# Altium PCB CT310高端控制盒核心板电路V1.2.PcbDoc (part 1 of 4)
Units mil, origin at the board's own origin, x right, y up, seen from the top; angles counter-clockwise.
Board outline 3735.76 x 4625 mil, 2 copper layers (TOP, BOTTOM), stack 10.4 mil thick; 194 components, 362 nets, 1084 pads, 348 vias.
Unrouted connection lines stored in the file: 16.
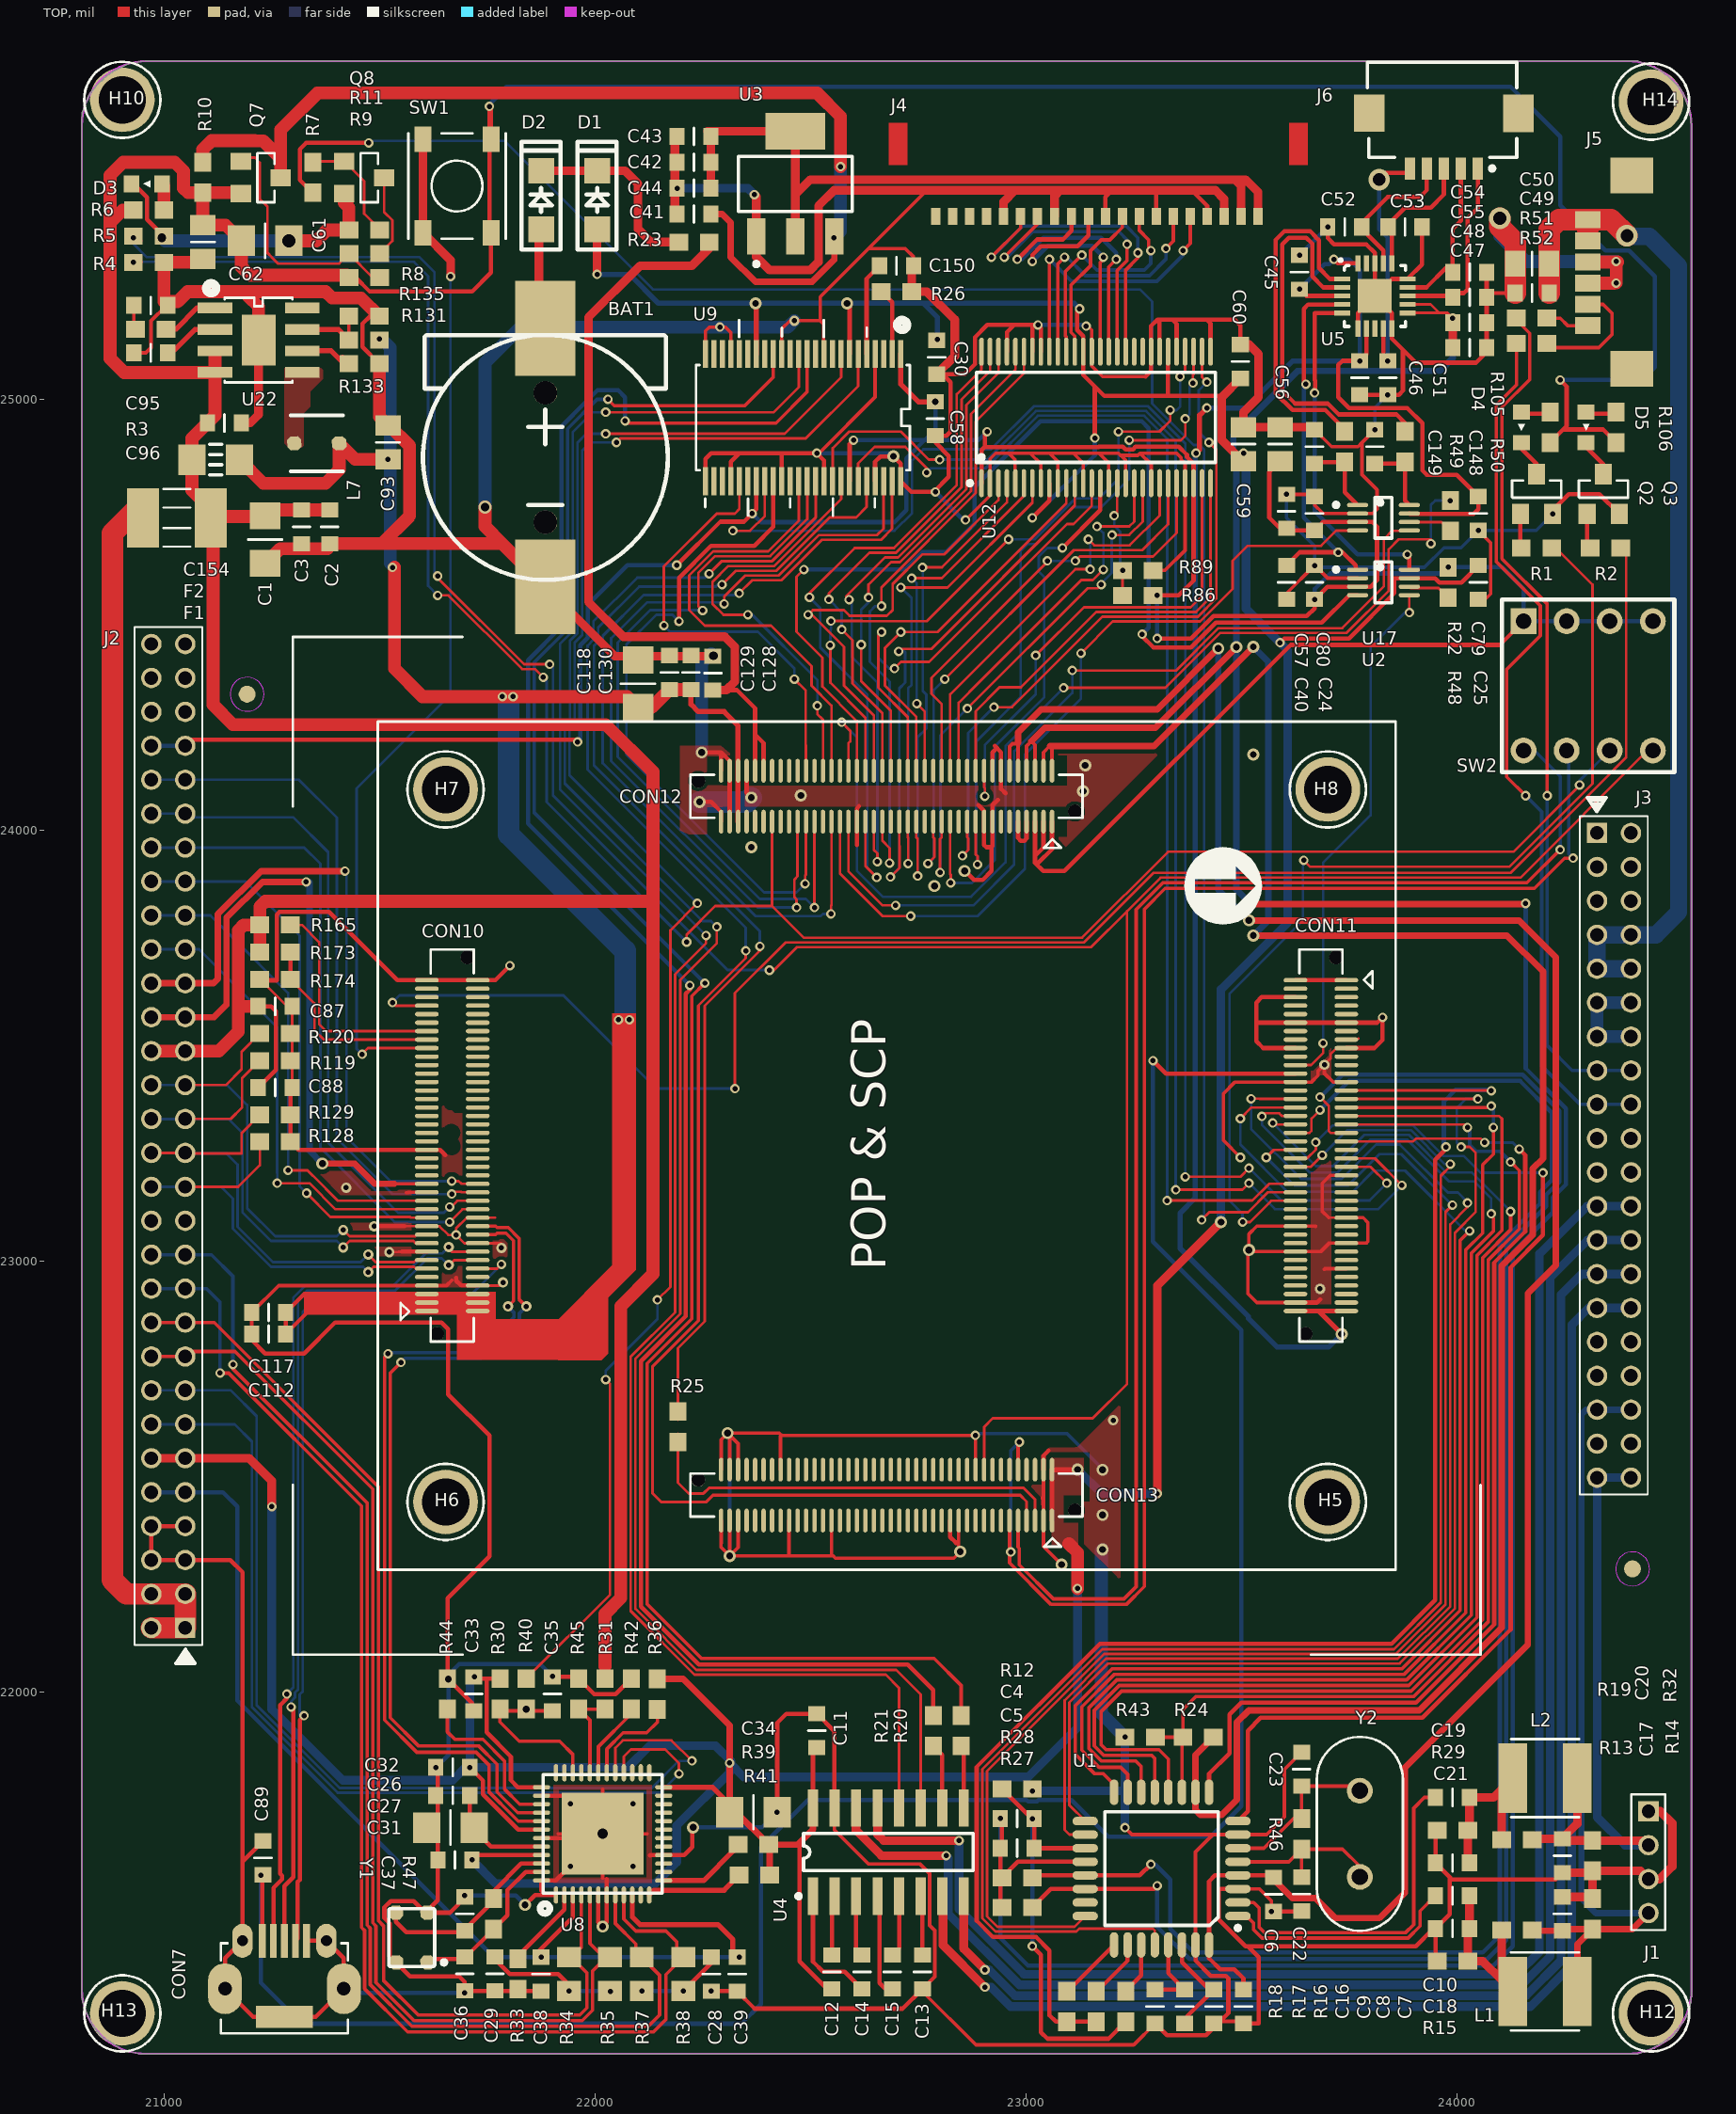
[diagram p0: TOP view]
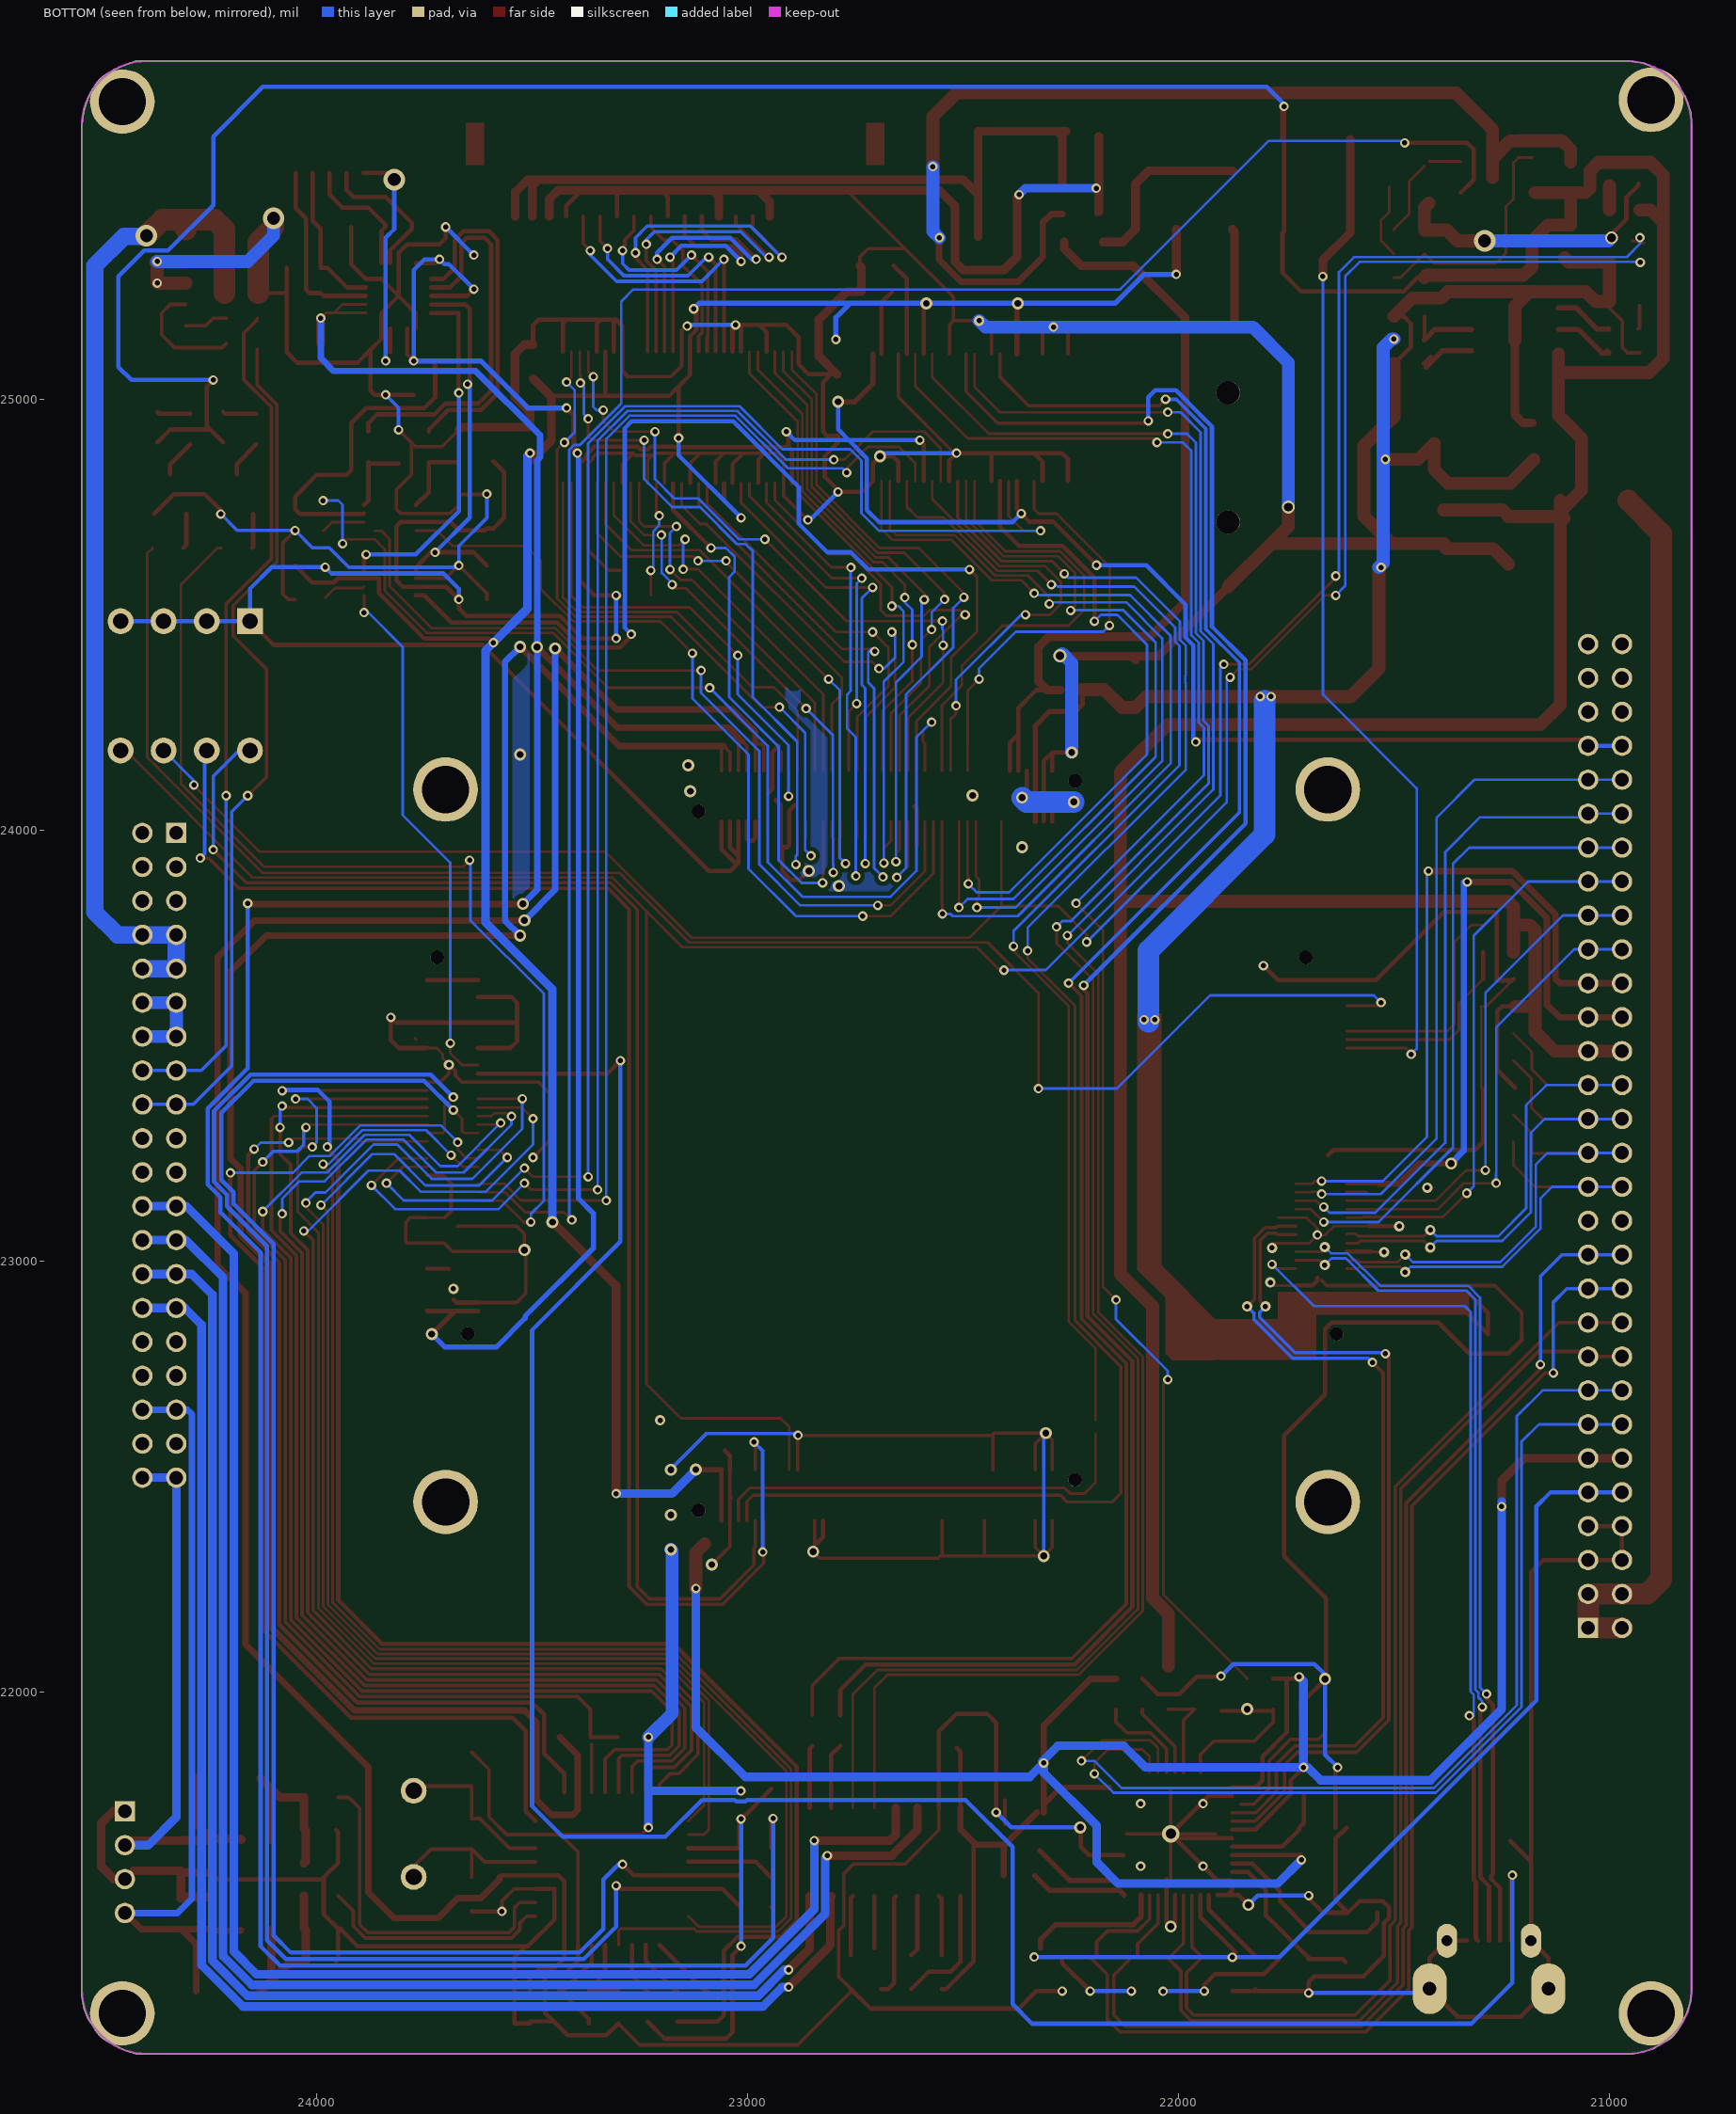
[diagram p1: BOTTOM view, seen from below]
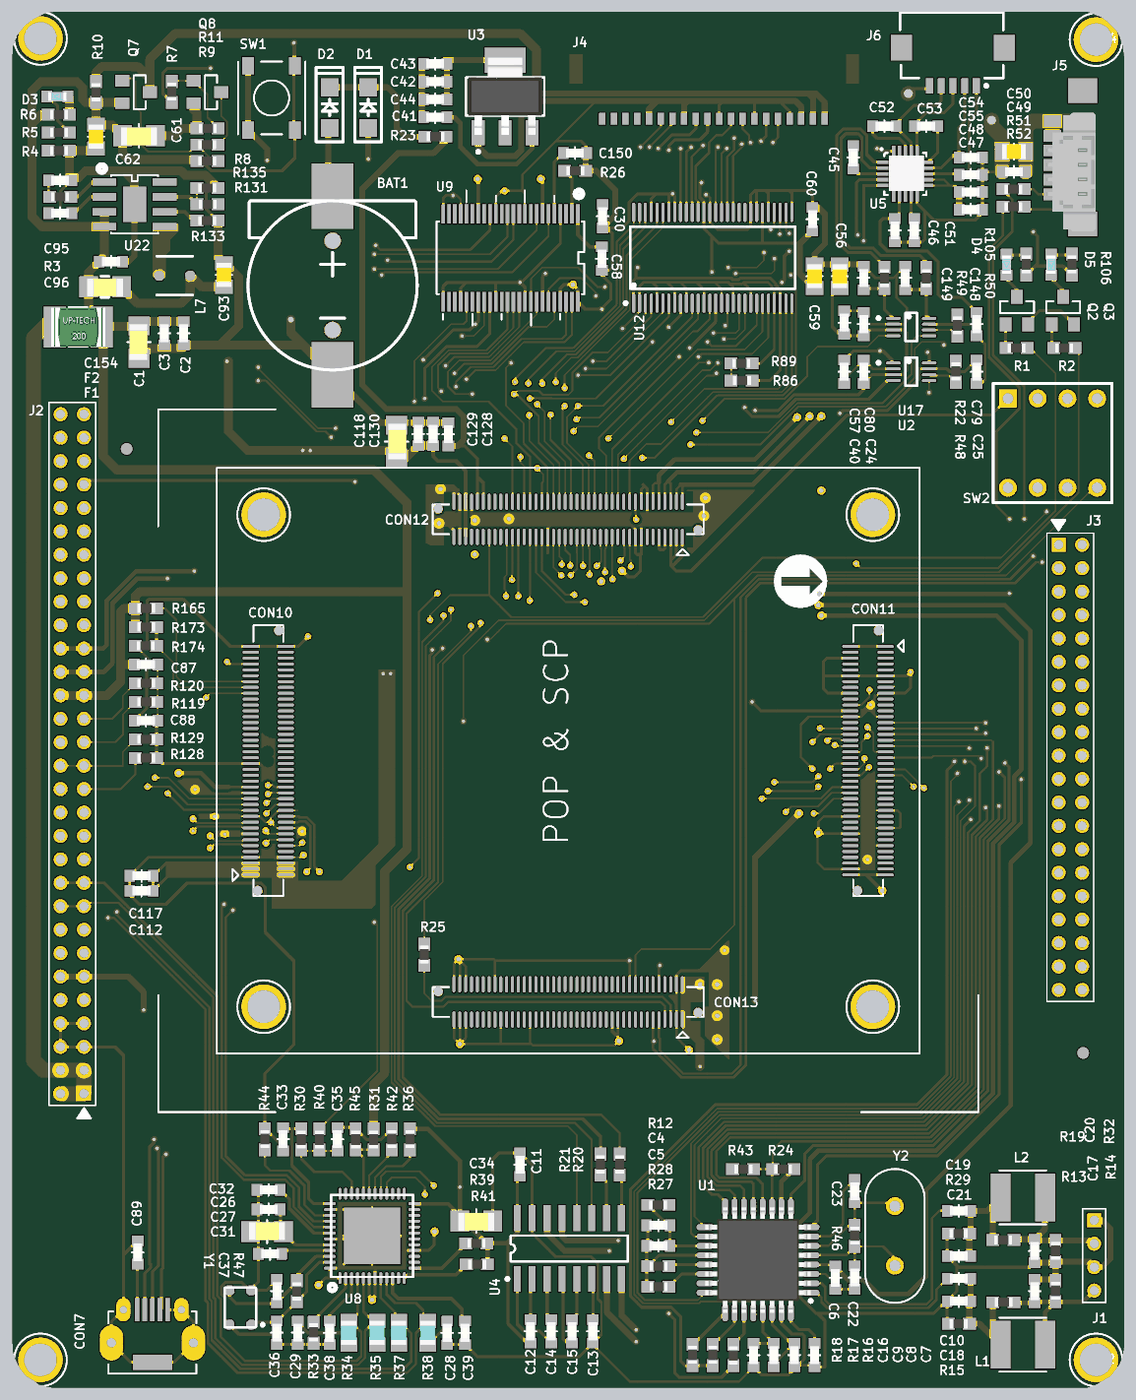
[diagram p5: 3D render of the assembled board from above, using the file's embedded part models]

## Layer stack, top to bottom
TOP: signal copper 1.2
Dielectric: core 8, FR-4, Dk 4.5
BOTTOM: signal copper 1.2

## Board outline
20809.24,25639.24 20809.24,21310.76 20810,21285 20820,21255 20835,21225 20855,21200 20880,21185 20900,21170 20945,21160 20970,21160 24400,21160 24420,21160 24450,21170 24475,21185 24500,21200 24515,21220 24530,21240 24540,21265 24545,21295 24545,21305 24545,25635 24540,25670 24530,25700 24520,25720 24505,25735 24490,25750 24470,25765 24445,25775 24420,25785 24395,25785 20955,25785 20920,25780 20900,25770 20880,25760 20860,25745 20845,25730 20825,25705 20810,25665 20809.24,25639.24

## Design rules (kind name [scope] priority, off if disabled: settings)
Clearance [All] p1: gap=5
HoleSize [All] p1: absolutevalues=TRUE maxlimit=200 minlimit=1 maxpercent=80.000 minpercent=20.000
MinimumSolderMaskSliver [All] p1: minsoldermaskwidth=8
PlaneConnect [All] p1: planeconnectstyle=Direct reliefexpansion=20 reliefentries=4 reliefconductorwidth=10 reliefairgap=10
PolygonConnect [All] p1: connectstyle=Direct reliefconductorwidth=10 reliefentries=4 polygonreliefangle="90 Angle" airgapwidth=10
RoutingVias [All] p1: holewidth=28 width=50 viastyle="Through Hole" minholewidth=10 minwidth=10 maxholewidth=50 maxwidth=100
SolderMaskExpansion [All] p1: expansion=4
Width [All] p1: maxlimit=100 minlimit=6 preferedwidth=10 minimp=60.000000 maximp=60.000000 favimp=60.000000
25 further rules are at their usual default settings.

## Classes and differential pairs
component class P02-DC_JACK: BAT1 C1 C2 C3 D1 D2 D3 F1 H5 H6 H7 H8 H10 H12 H13 H14 R6 R23 SW1
component class P03-UARTs_KEY: C11 C12 C13 C14 C15 D4 D5 Q2 Q3 R1 R2 R20 R21 R105 R106 U4
component class P04-NET: C26 C27 C28 C29 C30 C31 C32 C33 C34 C35 C36 C37 C38 C39 C58 C150 R25 R26 R30 R31 R33 R34 R35 R36 R37 R38 R39 R40 R41 R42 R44 R45 R47 U8 U9 Y1
component class P07-LCD: C24 C25 C40 C41 C42 C43 C44 C45 C46 C47 C48 C49 C50 C51 C52 C53 C54 C55 C56 C57 C59 C60 C61 C62 C79 C80 C148 C149 J4 J5 J6 Q7 Q8 R7 R8 R9 R10 R11 R22 R48 R49 R50 R51 R52 R86 R89 U2 U3 U5 U12 U17
component class P09-USB_JTAG: C87 C88 C89 CON7 R119 R120 R128 R129
component class "P11-CAMERA AVIN": C4 C5 C6 C7 C8 C9 C10 C16 C17 C18 C19 C20 C21 C22 C23 J1 L1 L2 R12 R13 R14 R15 R16 R17 R18 R19 R24 R27 R28 R29 R32 R43 R46 U1 Y2
component class P15-EXP_IO: C93 C95 C96 C112 C117 C118 C128 C129 C130 C154 CON10 CON11 con12 CON13 F2 L7 R3 R4 R5 R131 R133 R135 R165 R173 R174 SW2 U22
net class LCD_VD[0..23]: LCD_VD0 LCD_VD1 LCD_VD2 LCD_VD3 LCD_VD4 LCD_VD5 LCD_VD6 LCD_VD7 LCD_VD8 LCD_VD9 LCD_VD10 LCD_VD11 LCD_VD12 LCD_VD13 LCD_VD14 LCD_VD15 LCD_VD16 LCD_VD17 LCD_VD18 LCD_VD19 LCD_VD20 LCD_VD21 LCD_VD22 LCD_VD23
net class XM0ADDR[0..7]: XM0ADDR0 XM0ADDR1 XM0ADDR2 XM0ADDR3 XM0ADDR4 XM0ADDR5 XM0ADDR6 XM0ADDR7
net class XM0DATA[0..15]: XM0DATA0 XM0DATA1 XM0DATA2 XM0DATA3 XM0DATA4 XM0DATA5 XM0DATA6 XM0DATA7 XM0DATA8 XM0DATA9 XM0DATA10 XM0DATA11 XM0DATA12 XM0DATA13 XM0DATA14 XM0DATA15
component class P16-Connector: J2 J3

## Components (designator, comment, footprint, x,y, rotation, side; value= is the part's Value field where it differs from the comment)
BAT1 "CR1220" BAT1 21885,24865 r90 top
C1 "100uF/10V" C1206-S 21234.43,24674.53 r270 top
C2 "0.1uF/10V" C0603-S 21384.43,24704.06 r270 top
C3 "10uF/10V" C0603-S 21319.43,24704.06 r270 top
C4 "2.2uF" C0603-S 22980,21706.25 r180 top
C5 "0.1uF" C0603-S 22980,21637.5 r180 top
C6 "2.2uF" C0603-S 23575,21530 r90 top
C7 "0.1uF" C0603-S 23505,21270 r90 top
C8 "1uF" C0603-S 23436.67,21270 r90 top
C9 "1uF" C0603-S 23368.33,21270 r270 top
C10 "0.1uF" C0603-S 23990,21527 r180 top
C11 "0.1uF" C0603-S 22515,21910 r90 top
C12 "0.1uF" C0603-S 22550,21350 r90 top
C13 "0.1uF" C0603-S 22760,21350 r270 top
C14 "0.1uF" C0603-S 22620,21350 r270 top
C15 "0.1uF" C0603-S 22690,21350 r90 top
C16 "1uF" C0603-S 23300,21270 r90 top
C17 "0.1uF/NC" C0603-S 24245,21485 r90 top
C18 "0.1uF/NC" C0603-S 23990,21451 r180 top
C19 "0.1uF" C0603-S 23990,21755 r180 top
C20 "0.1uF/NC" C0603-S 24245,21620 r270 top
C21 "0.1uF/NC" C0603-S 23990,21603 r180 top
C22 "22pF" C0603-s 23640,21530.63 r270 top
C23 "22pF" C0603-s 23640,21820.63 r270 top
C24 "0.1uF" C0603-S 23670,24575 r90 top
C25 "0.1uF" C0603-S 24050,24575 r270 top
C26 "0.1uF" C0603-S 21670,21760 r180 top
C27 "22uF" C1206-S 21665,21685 r180 top
C28 "0.1uF" C0603-S 22270,21345 r90 top
C29 "0.1uF" C0603-S 21767.85,21345.57 r90 top
C30 "0.1uF" C0603-S 22792.85,25097.64 r270 top
C31 "0.1uF" C0603-S 21675,21610 r180 top
C32 "0.1uF" C0603-S 21670,21825 r180 top
C33 "0.1uF" C0603-S 21718.75,21995.57 r270 top
C34 "22uF" C1206-S 22367.85,21720.57 r0 top
C35 "0.1uF" C0603-S 21901.43,21995.57 r270 top
C36 "22pF" C0603-S 21697.85,21345.57 r270 top
C37 "22pF" C0603-S 21697.85,21485 r90 top
C38 "0.1uF" C0603-S 21875,21345 r270 top
C39 "0.1uF" C0603-S 22330,21345 r270 top
C40 "0.1uF/NC" C0603-S 23605,24575 r270 top
C41 "10uF" C0603-s 22230,25430 r0 top
C42 "10uF" C0603-s 22230,25550 r0 top
C43 "0.1uF" C0603-s 22230,25610 r0 top
C44 "0.1uF" C0603-s 22230,25490 r0 top
C45 "0.1uF" C0603-S 23635,25295 r270 top
C46 "0.1uF" C0603-S 23775,25050 r90 top
C47 "0.1uF" C0603-S 24030,25120 r180 top
C48 "0.1uF" C0603-S 24030,25178.33 r180 top
C49 "0.1uF" C0603-s 24175,25246.67 r0 top
C50 "22uF" C0805-s 24175,25314.84 r0 top
C51 "1nF" C0603-S 23840,25050 r90 top
C52 "1nF" C0603-S 23740,25400 r0 top
C53 "1nF" C0603-S 23880,25400 r180 top
C54 "1nF" C0603-S 24030,25295 r180 top
C55 "1nF" C0603-S 24030,25236.67 r180 top
C56 "10uF" C0805-S 23590,24895.91 r90 top
C57 "0.1uF" C0603-S 23605,24740 r90 top
C58 "0.1uF" C0603-S 22790,24955 r270 top
C59 "10uF" C0805-S 23505,24895.91 r90 top
C60 "0.1uF" C0603-S 23497.85,25087.64 r90 top
C61 "47uF/16v" C1206-S 21234.43,25367.85 r0 top
C62 "10uF" C0805-S 21090,25365 r270 top
C79 "0.1uF" C0603-S 24050,24735 r270 top
C80 "0.1uF" C0603-S 23670,24735 r90 top
C87 "1uF/10V" C0603-S 21257.85,23591.21 r0 top
C88 "1uF/10V" C0603-S 21257.85,23402.43 r0 top
C89 "4.7uF" C0603-S 21230,21615 r270 top
C93 "22uF" C0805-S 21520,24900 r90 top
C95 "560pF" C0603-S 20969.43,25217.85 r0 top
C96 "10nF" C0603-S 20969.43,25107.85 r180 top
C112 "0.1uF/10V" C0603-S 21242.85,22830.57 r180 top
C117 "0.1uF/10V" C0603-S 21242.85,22880.57 r180 top
C118 "22uF/10V" C1206-S 22100,24340 r90 top
C128 "1uF/10V" C0603-S 22273.85,24364.57 r90 top
C129 "0.1uF/10V" C0603-S 22222.85,24365.89 r90 top
C130 "0.1uF/10V" C0603-S 22172.85,24365.89 r90 top
C148 "0.1uF/NC" C0603-S 23810,24890 r90 top
C149 "0.1uF/NC" C0603-S 23670,24890 r90 top
C150 "0.1uF/NC" C0603-S 22700,25310 r0 top
C154 "10uF" C0603-S 21140,24945 r0 top
CON7 "ZX62RD-AB-5P8" MICROUSB-B-H4 21279.43,21350.39 r90 top
CON10 "CON40X2_0_8MM" CON2X40-0_5MM-BB 21668.96,23267.89 r90 top
CON11 "CON40X2_0_8MM" CON2X40-0_5MM-BB 23684.7,23267.89 r270 top
CON12 "CON40X2_0_8MM" CON2X40-0_5MM-BB 22676.83,24078.92 r180 top
CON13 "CON40X2_0_8MM" CON2X40-0_5MM-BB 22676.83,22456.87 r180 top
D1 "IN4148" D1206 22005,25465 r270 top
D2 "IN4148" D1206 21875,25465 r270 top
D3 "LED-Red (SMD 2012)" LED0603 20960,25500 r180 top
D4 "LED-Red (SMD 2012)" LED0603 24150,24935 r270 top
D5 "LED-Red (SMD 2012)" LED0603 24300,24935 r270 top
F1 "500ma" F1812 21030,24725 r0 top
F2 "0R/NC" F1206 21120,24860 r0 top
H5 "TP_P0_0.8_D0" HOLE2_7 23700.76,22440.91 r0 top
H6 "TP_P0_0.8_D0" HOLE2_7 21653.5,22440.91 r0 top
H7 "TP_P0_0.8_D0" HOLE2_7 21653.5,24094.45 r0 top
H8 "TP_P0_0.8_D0" HOLE2_7 23700.86,24094.45 r0 top
H10 "TP_P0_0.8_D0" HOLE2_7 20903.19,25695 r0 top
H12 "TP_P0_0.8_D0" HOLE2_7 24451.05,21253.95 r0 top
H13 "TP_P0_0.8_D0" HOLE2_7 20903.19,21253.95 r0 top
H14 "TP_P0_0.8_D0" HOLE2_7 24451.05,25691.05 r0 top
J1 "HEADER1X4" HD1X4-2.00 24445,21605 r270 top
J2 "HEADER 30X2" HD2X30-2.00 21010,23290.37 r90 top
J3 "HEADER 2X20" HD2X20-2.00 24365,23245.42 r270 top
J4 "Header 20" DF19G-20P 23165,25425 r180 top
J5 "DF13-6P-1.25V" DF13-6P-1.25V 24355,25295 r90 top
J6 "HEADER1X5" FFC/SM1.0-5 23970,25600 r180 top
L1 "3.3uH/NC" L4X4-S 24205,21305 r180 top
L2 "3.3uH/NC" L4X4-S 24205,21800 r180 top
L7 "2.2uH" L3X3MM 21354.43,24897.85 r0 top
Q2 "L9014" SOT-23 24185,24780 r180 top
Q3 "L9014" SOT-23 24340,24780 r180 top
Q7 "AO3415A" SOT-23 21224.68,25515 r90 top
Q8 "L9014" SOT-23 21464.68,25515 r90 top
R1 "1K" R0603-S 24185,24655 r0 top
R2 "1K" R0603-S 24345,24655 r0 top
R3 "33K/NC" R0603-S 20969.43,25162.85 r0 top
R4 "10K" R0603-S 20964.43,25317.85 r180 top
R5 "10K" R0603-S 20964.43,25378.57 r180 top
R6 "10K" R0603-S 20964.43,25439.28 r180 top
R7 "1K" R0603-S 21345,25515 r270 top
R8 "100K" R0603-S 21464.68,25282.85 r0 top
R9 "22R" R0603-S 21464.68,25337.85 r0 top
R10 "0R/NC" R0603-S 21090,25515 r90 top
R11 "10K/NC" R0603-S 21464.68,25392.85 r180 top
R12 "0R" R0603-S 22980,21775 r0 top
R13 "37.4R" R0603-S 24140,21447.6 r180 top
R14 "37.4R" R0603-S 24315,21485 r270 top
R15 "75R/NC" R0603-S 23990,21375 r0 top
R16 "10k" R0603-S 23231.67,21270 r90 top
R17 "0R/NC" R0603-S 23163.33,21270 r270 top
R18 "0R" R0603-S 23095,21270 r270 top
R19 "37.4R" R0603-S 24140,21657.4 r0 top
R20 "0R" R0603-S 22850,21910 r270 top
R21 "0R" R0603-S 22785,21910 r270 top
R22 "0R" R0603-S 23985,24730 r270 top
R23 "0R" R0603-S 22230,25365 r180 top
R24 "10k" R0603-S 23400,21895 r0 top
R25 "0R" R0603-S 22192.85,22615.57 r270 top
R26 "10K" R0603-S 22700,25250 r180 top
R27 "2.2k/NC" R0603-S 22980,21500 r180 top
R28 "2.2k/NC" R0603-S 22980,21568.75 r180 top
R29 "75R/NC" R0603-S 23990,21679 r0 top
R30 "10K/NC" R0603-S 21779.64,21995.57 r90 top
R31 "15K" R0603-S 22023.21,21995.57 r90 top
R32 "37.4R" R0603-S 24315,21620 r270 top
R33 "10K" R0603-S 21821.43,21345.57 r270 top
R34 "49.9R" R0805-S 21940,21345 r270 top
R35 "49.9R" R0805-S 22035,21345 r270 top
R36 "10K" R0603-S 22145,21995 r270 top
R37 "49.9R" R0805-S 22108.33,21345 r270 top
R38 "49.9R" R0805-S 22205,21345 r270 top
R39 "10K" R0603-S 22367.85,21645.57 r180 top
R40 "0R" R0603-S 21840.53,21995.57 r90 top
R41 "10K" R0603-S 22370,21575 r180 top
R42 "10K" R0603-S 22084.11,21995.57 r270 top
R43 "NC" R0603-S 23265,21895 r180 top
R44 "10K" R0603-S 21657.85,21995.57 r270 top
R45 "47K" R0603-S 21962.32,21995.57 r90 top
R46 "1M" R0603-S 23640,21670.63 r270 top
R47 "1M" R0603-S 21765,21485 r90 top
R48 "10K" R0603-S 23980,24575 r270 top
R49 "0R" R0603-S 23740,24890 r90 top
R50 "0R" R0603-S 23880,24890 r90 top
R51 "NC" R0603-S 24173.91,25188.33 r0 top
R52 "NC" R0603-S 24173.91,25130 r0 top
R86 "10K" R0603-S 23260,24545 r180 top
R89 "NC" R0603-S 23260,24602.85 r0 top
R105 "1K" R0603-S 24216.67,24935 r270 top
R106 "1K" R0603-S 24370,24935 r270 top
R119 "15K" R0603-S 21257.85,23465.36 r180 top
R120 "15K" R0603-S 21257.85,23528.29 r180 top
R128 "15K" R0603-S 21257.85,23276.57 r180 top
R129 "15K" R0603-S 21257.85,23339.5 r180 top
R131 "NC" R0603-S 21464.43,25137.85 r180 top
R133 "510K  1%" R0603-S 21464.43,25082.85 r0 top
R135 "NC" R0603-S 21464.43,25192.85 r0 top
R165 "800K" R0603-S 21257.85,23780 r180 top
R173 "800K/NC" R0603-S 21257.85,23717.07 r180 top
R174 "0R" R0603-S 21257.85,23654.14 r0 top
SW1 "RESET" SW4-SMD 21680,25495 r90 top
SW2 "SW-3" bmkg4 24305,24335 r0 top
U1 "TVP5150AM1PBSR" QFP7X7-32 23315,21590 r180 top
U2 "TXS0102DCU" tssop8 23830,24575 r270 top
U3 "REG1117-3.3V" SOT-223 22465,25500 r0 top
U4 "MAX3232CSE" SO-16 22679.43,21627.85 r0 top
U5 "TSC2004IRTJ" QFN20 23810,25240 r0 top
U8 "DM9621ANP" QFN48-050-0707LH 22017.85,21670.57 r90 top
U9 "U-74ALVC164245DGG" TSSOP_48 22482.85,24957.64 r180 top
U12 "GM8285C" TSSOP56 23162.85,24957.96 r0 top
U17 "TXS0102DCU" TSSOP8 23830,24725 r270 top
U22 "RT8065ZSP" SOIC8-LH 21219.43,25137.85 r270 top
Y1 "25MHz" X4-2_5X3_2 21575,21430 r180 top
Y2 "14.31818MHz" CRYSTAL_D200 23775,21670.37 r270 top

## Footprints (in the part's own frame and the unit in brackets; to place one, negate y for a bottom-side part, rotate by r counter-clockwise, add the part's x,y. Pads: shape width x height; smd on the part's side, far side on the other; paste and mask are expansions set on the pad)
BAT1 [mil] "BAT1"
  rect 220x140 smd: 1(300,0) 2(-300,0)
  round 55 / inner round 60 / far side round 55 hole 55: " "(-150,0) " "(150,0)
  silkscreen extent -284,-284 284,284
bmkg4 [mil] "BMKG4"
  round 60 hole 36: 1(-150,-150) 2(-50,-150) 3(50,-150) 4(150,-150) 5(150,150) 6(50,150) 7(-50,150)
  rect 60x60 / inner round 60 / far side rect 60x60 hole 36: 8(-150,150)
  silkscreen extent -200,-200 200,200
C0603-S [mm]
  rect 0.9x1 smd: 1(-1,0) 2(1,0)
  silkscreen extent 0,-0.5 0,0.5, body extent -0.76,-0.39 0.76,0.38, height 0.46
C0603-s [mm]
  rect 0.9x1 smd: 1(-1,0) 2(1,0)
  silkscreen extent 0,-0.5 0,0.5, body extent -0.76,-0.39 0.76,0.38, height 0.46
C0805-s [mm]
  rect 1.2x1.5 smd: 1(-1,0) 2(1,0)
  silkscreen extent 0,-0.69 0,0.69, body extent -1.02,-0.64 1.02,0.64, height 0.61
C0805-S [mm]
  rect 1.2x1.5 smd: 1(-1,0) 2(1,0)
  silkscreen extent 0,-0.69 0,0.69, body extent -1.02,-0.64 1.02,0.64, height 0.61
C1206-S [mm]
  rect 1.6x1.8 smd: 1(-1.4,0) 2(1.4,0)
  silkscreen extent 0,-1 0,1, body extent -1.52,-0.82 1.52,0.71, height 0.61
CON2X40-0_5MM-BB [mil] "CON2X40-0_5MM-BB"
  oval 10x55 smd: 1(-383.86,59.06) 2(-383.86,-59.06) 3(-364.17,59.06) 4(-364.17,-59.06) 5(-344.49,59.06) 6(-344.49,-59.06) 7(-324.8,59.06) 8(-324.8,-59.06) 9(-305.12,59.06) 10(-305.12,-59.06) 11(-285.43,59.06) 12(-285.43,-59.06) 13(-265.75,59.06) 14(-265.75,-59.06) 15(-246.06,59.06) 16(-246.06,-59.06) 17(-226.38,59.06) 18(-226.38,-59.06) 19(-206.69,59.06) 20(-206.69,-59.06) 21(-187.01,59.06) 22(-187.01,-59.06) 23(-167.32,59.06) 24(-167.32,-59.06) 25(-147.64,59.06) 26(-147.64,-59.06) 27(-127.95,59.06) 28(-127.95,-59.06) 29(-108.27,59.06) 30(-108.27,-59.06) 31(-88.58,59.06) 32(-88.58,-59.06) 33(-68.9,59.06) 34(-68.9,-59.06) 35(-49.21,59.06) 36(-49.21,-59.06) 37(-29.53,59.06) 38(-29.53,-59.06) 39(-9.84,59.06) 40(-9.84,-59.06) 41(9.84,59.06) 42(9.84,-59.06) 43(29.53,59.06) 44(29.53,-59.06) 45(49.21,59.06) 46(49.21,-59.06) 47(68.9,59.06) 48(68.9,-59.06) 49(88.58,59.06) 50(88.58,-59.06) 51(108.27,59.06) 52(108.27,-59.06) 53(127.95,59.06) 54(127.95,-59.06) 55(147.64,59.06) 56(147.64,-59.06) 57(167.32,59.06) 58(167.32,-59.06) 59(187.01,59.06) 60(187.01,-59.06) 61(206.69,59.06) 62(206.69,-59.06) 63(226.38,59.06) 64(226.38,-59.06) 65(246.06,59.06) 66(246.06,-59.06) 67(265.75,59.06) 68(265.75,-59.06) 69(285.43,59.06) 70(285.43,-59.06) 71(305.12,59.06) 72(305.12,-59.06) 73(324.8,59.06) 74(324.8,-59.06) 75(344.49,59.06) 76(344.49,-59.06) 77(364.17,59.06) 78(364.17,-59.06) 79(383.86,59.06) 80(383.86,-59.06)
  round 32 / inner round 60 / far side round 32 hole 32: " "(-437.01,35.43) " "(437.01,-35.43)
  silkscreen extent -455,-50 455,120
CRYSTAL_D200 [mil] "CRYSTAL_D200"
  round 60 hole 38: 1(-100.26,0) 2(99.74,0)
  silkscreen extent -225,-100 225,100
D1206 [mil] "D1206"
  rect 60x60 smd: 1(70.49,0) 2(-65.49,0)
  silkscreen extent -132,-45 118,45
DF13-6P-1.25V [mm]
  rect 2.1x2.5 smd: 0(-5.699,-1.3) 0(5.699,-1.3)
  rect 1x1.5 smd: 1(-3.149,1.3) 2(-1.899,1.3) 3(-0.649,1.3) 4(0.601,1.3) 5(1.851,1.3) 6(3.101,1.3)
  body extent -6.32,-2.42 3.83,1.78, height 4.8
DF19G-20P [mm]
  rect 0.55x1 smd: 1(-9.5,0) 2(-8.5,0) 3(-7.5,0) 4(-6.5,0) 5(-5.5,0) 6(-4.5,0) 7(-3.5,0) 8(-2.5,0) 9(-1.5,0) 10(-0.5,0) 11(0.5,0) 12(1.5,0) 13(2.5,0) 14(3.5,0) 15(4.5,0) 16(5.5,0) 17(6.5,0) 18(7.5,0) 19(8.5,0) 20(9.5,0)
  TOP region: 11.171,-5.508 12.271,-5.508 12.271,-3.008 11.171,-3.008
  TOP region: -12.429,-5.508 -11.329,-5.508 -11.329,-3.008 -12.429,-3.008
F1206 [mm]
  rect 1.6x1.8 smd: 1(-1.4,0) 2(1.4,0)
  silkscreen extent -0.35,-0.9 0.35,0.9, body extent -1.52,-0.82 1.52,0.71, height 0.61
F1812 [mm]
  rect 1.9x3.5 smd: 1(-2,0) 2(2,0)
  silkscreen extent -0.8,-1.7 0.8,1.7, body extent -2.29,-1.65 2.31,1.65, height 0.69
FFC/SM1.0-5 [mm] "Connector; FH12 Series; 9 Position; 1.0mm Spaced Bottom Standard Contact"
  rect 1.8x2.2 smd: 0(-4.4,-1.62) 0(4.4,-1.63)
  rect 0.6x1.3 smd: 1(-2,1.63) 2(-1,1.63) 3(0,1.63) 4(1,1.63) 5(2,1.63)
  silkscreen extent -4.3,-4.63 4.51,1.75
HD1X4-2.00 [mm]
  rect 1.2x1.2 hole 0.8: 1(-3,0)
  round 1.2 hole 0.8: 2(-1,0) 3(1,0) 4(3,0)
  silkscreen extent -4,-1.01 4,0.99
HD2X20-2.00 [mm]
  rect 1.2x1.2 hole 0.8: 1(-19,-1)
  round 1.2 hole 0.8: 2(-19,1) 3(-17,-1) 4(-17,1) 5(-15,-1) 6(-15,1) 7(-13,-1) 8(-13,1) 9(-11,-1) 10(-11,1) 11(-9,-1) 12(-9,1) 13(-7,-1) 14(-7,1) 15(-5,-1) 16(-5,1) 17(-3,-1) 18(-3,1) 19(-1,-1) 20(-1,1) 21(1,-1) 22(1,1) 23(3,-1) 24(3,1) 25(5,-1) 26(5,1) 27(7,-1) 28(7,1) 29(9,-1) 30(9,1) 31(11,-1) 32(11,1) 33(13,-1) 34(13,1) 35(15,-1) 36(15,1) 37(17,-1) 38(17,1) 39(19,-1) 40(19,1)
  silkscreen extent -21.09,-2.01 20,1.99
HD2X30-2.00 [mm]
  rect 1.2x1.2 hole 0.8: 1(-29,-1)
  round 1.2 hole 0.8: 2(-29,1) 3(-27,-1) 4(-27,1) 5(-25,-1) 6(-25,1) 7(-23,-1) 8(-23,1) 9(-21,-1) 10(-21,1) 11(-19,-1) 12(-19,1) 13(-17,-1) 14(-17,1) 15(-15,-1) 16(-15,1) 17(-13,-1) 18(-13,1) 19(-11,-1) 20(-11,1) 21(-9,-1) 22(-9,1) 23(-7,-1) 24(-7,1) 25(-5,-1) 26(-5,1) 27(-3,-1) 28(-3,1) 29(-1,-1) 30(-1,1) 31(1,-1) 32(1,1) 33(3,-1) 34(3,1) 35(5,-1) 36(5,1) 37(7,-1) 38(7,1) 39(9,-1) 40(9,1) 41(11,-1) 42(11,1) 43(13,-1) 44(13,1) 45(15,-1) 46(15,1) 47(17,-1) 48(17,1) 49(19,-1) 50(19,1) 51(21,-1) 52(21,1) 53(23,-1) 54(23,1) 55(25,-1) 56(25,1) 57(27,-1) 58(27,1) 59(29,-1) 60(29,1)
  silkscreen extent -31.09,-2.01 30,1.99
HOLE2_7 [mil] "HOLE2_7"
  round 150 / inner round 60 / far side round 150 hole 110: 1(0,0)
  silkscreen extent -88,-88 88,88
L3X3MM [mm] "L3X3MM"
  oct 0.846x0.846 smd rot 93: 1(-1.325,0) 2(1.325,0)
  silkscreen extent -1.55,-1.65 1.55,1.65
L4X4-S [mil] "L4X4-S"
  rect 67x161 smd: 1(-74.8,0) 2(74.8,0)
  silkscreen extent -79,-91 79,91
LED0603 [mm]
  rect 0.9x1 smd: 1(-0.9,0) 2(0.9,0)
  silkscreen extent -0.2,-0.2 0.2,0.2, body extent -0.76,-0.38 0.76,0.38, height 0.76
MICROUSB-B-H4 [mm] "MICROUSB-B-H4"
  rect 2x0.4 smd: 1(1.83,1.3) 2(1.83,0.65) 3(1.83,0) 4(1.83,-0.65) 5(1.83,-1.3)
  oval 2x1.2 / inner round 1.524 / far side oval 2x1.2 hole 0.65: 6(1.83,2.475) 7(1.83,-2.475)
  oval 3x2 / inner round 1.524 / far side oval 3x2 hole 0.8: 8(-0.995,3.5) 9(-0.995,-3.5)
  rect 1.3x3.35 smd: 10(-2.65,0)
  silkscreen extent -3.62,-3.75 4.18,3.75
QFN20 [mm]
  rect 0.95x0.3 smd: 1(-1.925,1) 2(-1.925,0.5) 3(-1.925,0) 4(-1.925,-0.5) 5(-1.925,-1) 11(1.925,-1) 12(1.925,-0.5) 13(1.925,0) 14(1.925,0.5) 15(1.925,1)
  rect 0.3x0.95 smd: 6(-1,-1.925) 7(-0.5,-1.925) 8(0,-1.925) 9(0.5,-1.925) 10(1,-1.925) 16(1,1.925) 17(0.5,1.925) 18(0,1.925) 19(-0.5,1.925) 20(-1,1.925)
  rect 2x2 smd: 21(0,0)
  silkscreen extent -2.08,-1.8 1.8,2.16, body extent -1.4,-1.45 1.6,1.55, height 0.62
QFN48-050-0707LH [mil] "QFN48-050-0707LH"
  oval 40x10 smd: 1(-141.73,108.27) 2(-141.73,88.58) 3(-141.73,68.9) 4(-141.73,49.21) 5(-141.73,29.53) 6(-141.73,9.84) 7(-141.73,-9.84) 8(-141.73,-29.53) 9(-141.73,-49.21) 10(-141.73,-68.9) 11(-141.73,-88.58) 12(-141.73,-108.27) 25(141.73,-108.27) 26(141.73,-88.58) 27(141.73,-68.9) 28(141.73,-49.21) 29(141.73,-29.53) 30(141.73,-9.84) 31(141.73,9.84) 32(141.73,29.53) 33(141.73,49.21) 34(141.73,68.9) 35(141.73,88.58) 36(141.73,108.27)
  oval 10x40 smd: 13(-108.27,-141.73) 14(-88.58,-141.73) 15(-68.9,-141.73) 16(-49.21,-141.73) 17(-29.53,-141.73) 18(-9.84,-141.73) 19(9.84,-141.73) 20(29.53,-141.73) 21(49.21,-141.73) 22(68.9,-141.73) 23(88.58,-141.73) 24(108.27,-141.73) 37(108.27,141.73) 38(88.58,141.73) 39(68.9,141.73) 40(49.21,141.73) 41(29.53,141.73) 42(9.84,141.73) 43(-9.84,141.73) 44(-29.53,141.73) 45(-49.21,141.73) 46(-68.9,141.73) 47(-88.58,141.73) 48(-108.27,141.73)
  rect 190x190 smd: 49(0,0)
  silkscreen extent -184,-138 138,145
QFP7X7-32 [mm]
  oval 1.5x0.5 smd: 1(-4.5,2.8) 2(-4.5,2) 3(-4.5,1.2) 4(-4.5,0.4) 5(-4.5,-0.4) 6(-4.5,-1.2) 7(-4.5,-2) 8(-4.5,-2.8) 17(4.5,-2.8) 18(4.5,-2) 19(4.5,-1.2) 20(4.5,-0.4) 21(4.5,0.4) 22(4.5,1.2) 23(4.5,2) 24(4.5,2.8)
  oval 0.5x1.5 smd: 9(-2.8,-4.5) 10(-2,-4.5) 11(-1.2,-4.5) 12(-0.4,-4.5) 13(0.4,-4.5) 14(1.2,-4.5) 15(2,-4.5) 16(2.8,-4.5) 25(2.8,4.5) 26(2,4.5) 27(1.2,4.5) 28(0.4,4.5) 29(-0.4,4.5) 30(-1.2,4.5) 31(-2,4.5) 32(-2.8,4.5)
  silkscreen extent -4.63,-3.35 3.35,3.62, body extent -4.5,-4.49 4.5,4.51, height 1.75
R0603-S [mm]
  rect 1.1x1 smd: 1(-0.9,0) 2(0.9,0)
  body extent -0.79,-0.39 0.74,0.38, height 0.46
R0805-S [mm]
  rect 1.2x1.4 smd: 1(-1,0) 2(1,0)
  body extent -1.02,-0.65 1.02,0.62, height 0.61
SO-16 [mm]
  rect 0.6x2.2 smd: 1(-4.406,-2.588) 2(-3.136,-2.588) 3(-1.866,-2.588) 4(-0.596,-2.588) 5(0.674,-2.588) 6(1.944,-2.588) 7(3.214,-2.588) 8(4.484,-2.588) 9(4.484,2.612) 10(3.214,2.612) 11(1.944,2.612) 12(0.674,2.612) 13(-0.596,2.612) 14(-1.866,2.612) 15(-3.136,2.612) 16(-4.406,2.612)
  silkscreen extent -5.38,-2.71 5.04,1.11
SOIC8-LH [mil] "SOIC8-LH"
  rect 25x80 smd: 1(-74.5,-101.06) 2(-24.5,-101.06) 3(25.5,-101.06) 4(75.5,-101.06) 5(75.5,101.06) 6(25.5,101.06) 7(-24.5,101.06) 8(-74.5,101.06)
  rect 118.11x78.74 smd: 9(0.5,0)
  silkscreen extent -131,-121 99,79
SOT-23 [mm] "SOT-23"
  rect 1x1.2 smd: 1(0.952,1.175) 2(-0.953,1.175) 3(-0.013,-1.175)
  silkscreen extent -1.46,-0.81 1.44,0.21
SOT-223 [mm]
  rect 1.1x2.15 smd: 1(-2.3,-3.1) 2(0,-3.1) 3(2.3,-3.1)
  rect 3.5x2.15 smd: 4(0,3.1)
  silkscreen extent -3.35,-4.85 3.35,1.63, body extent -3.15,-3.3 3.15,3.3, height 1.8
SW4-SMD [mm] "SW4-SMD"
  rect 1.5x1 smd: 1(-2.75,-2) 2(2.75,-2) 3(2.75,2) 4(-2.75,2)
  silkscreen extent -3.1,-2.87 3.1,2.87
tssop8 [mm] "TSSOP8"
  oval 0.25x1.25 smd: 1(-0.75,-1.525) 2(-0.25,-1.525) 3(0.25,-1.525) 4(0.75,-1.525) 5(0.75,1.525) 6(0.25,1.525) 7(-0.25,1.525) 8(-0.75,1.525)
  silkscreen extent -1.2,-2.92 1.2,0.5
TSSOP8 [mm] "TSSOP8"
  oval 0.25x1.25 smd: 1(-0.75,-1.525) 2(-0.25,-1.525) 3(0.25,-1.525) 4(0.75,-1.525) 5(0.75,1.525) 6(0.25,1.525) 7(-0.25,1.525) 8(-0.75,1.525)
  silkscreen extent -1.2,-2.92 1.2,0.5
TSSOP56 [mm] "TSSOP56"
  oval 0.27x1.65 smd: 1(-6.75,-3.875) 2(-6.25,-3.875) 3(-5.75,-3.875) 4(-5.25,-3.875) 5(-4.75,-3.875) 6(-4.25,-3.875) 7(-3.75,-3.875) 8(-3.25,-3.875) 9(-2.75,-3.875) 10(-2.25,-3.875) 11(-1.75,-3.875) 12(-1.25,-3.875) 13(-0.75,-3.875) 14(-0.25,-3.875) 15(0.25,-3.875) 16(0.75,-3.875) 17(1.25,-3.875) 18(1.75,-3.875) 19(2.25,-3.875) 20(2.75,-3.875) 21(3.25,-3.875) 22(3.75,-3.875) 23(4.25,-3.875) 24(4.75,-3.875) 25(5.25,-3.875) 26(5.75,-3.875) 27(6.25,-3.875) 28(6.75,-3.875) 29(6.75,3.875) 30(6.25,3.875) 31(5.75,3.875) 32(5.25,3.875) 33(4.75,3.875) 34(4.25,3.875) 35(3.75,3.875) 36(3.25,3.875) 37(2.75,3.875) 38(2.25,3.875) 39(1.75,3.875) 40(1.25,3.875) 41(0.75,3.875) 42(0.25,3.875) 43(-0.25,3.875) 44(-0.75,3.875) 45(-1.25,3.875) 46(-1.75,3.875) 47(-2.25,3.875) 48(-2.75,3.875) 49(-3.25,3.875) 50(-3.75,3.875) 51(-4.25,3.875) 52(-4.75,3.875) 53(-5.25,3.875) 54(-5.75,3.875) 55(-6.25,3.875) 56(-6.75,3.875)
  silkscreen extent -7.56,-4 7.05,2.65
TSSOP_48 [mil] "TSSOP_48"
  rect 12x65 smd: 1(-226.38,-147.64) 2(-206.69,-147.64) 3(-187.01,-147.64) 4(-167.32,-147.64) 5(-147.64,-147.64) 6(-127.95,-147.64) 7(-108.27,-147.64) 8(-88.58,-147.64) 9(-68.9,-147.64) 10(-49.21,-147.64) 11(-29.53,-147.64) 12(-9.84,-147.64) 13(9.84,-147.64) 14(29.53,-147.64) 15(49.21,-147.64) 16(68.9,-147.64) 17(88.58,-147.64) 18(108.27,-147.64) 19(127.95,-147.64) 20(147.64,-147.64) 21(167.32,-147.64) 22(187.01,-147.64) 23(206.69,-147.64) 24(226.38,-147.64) 25(226.38,147.64) 26(206.69,147.64) 27(187.01,147.64) 28(167.32,147.64) 29(147.64,147.64) 30(127.95,147.64) 31(108.27,147.64) 32(88.58,147.64) 33(68.9,147.64) 34(49.21,147.64) 35(29.53,147.64) 36(9.84,147.64) 37(-9.84,147.64) 38(-29.53,147.64) 39(-49.21,147.64) 40(-68.9,147.64) 41(-88.58,147.64) 42(-108.27,147.64) 43(-127.95,147.64) 44(-147.64,147.64) 45(-167.32,147.64) 46(-187.01,147.64) 47(-206.69,147.64) 48(-226.38,147.64)
  silkscreen extent -248,-226 248,228
X4-2_5X3_2 [mil] "X4-2_5X3_2"
  oct 33.3x33.3 smd rot 3: 1(-36.54,57.68) 2(-36.54,-57.68) 3(36.54,-57.68) 4(36.54,57.68)
  silkscreen extent -80,-67 53,67

## Part data
BAT1: library part BATTERY_0
C1: library part CT2012_0
C2 C3 C26 C28 C29 C30 C31 C32 C33 C35 C38 C39 C150: library part C1608_Dup1
C4 C5 C6 C7 C45 C46 C47 C48 C51 C52 C53 C54 C55: library part "Cap Semi"
C8 C9 C10 C11 C12 C13 C14 C15 C16 C17 C18 C19 C20 C21 C24 C25 C40 C79 C80 C87 C88 C128: library part C0603_0
C22 C23 C89 C93: library part C1005
C27 C34 C118: library part C1206_0
C36 C37: library part CAP_1
C41 C42 C43 C44 C49 C50: library part CAP, "CAP"
C56 C59 C61 C62: library part C1608_Dup2
C57 C58 C60 C112 C117 C129 C130 C148 C149: library part C0402_0
C95 C96 C154: library part "CAP NP_3", "CER CHIP 1U 10% X5R 0402 10V  L/F"
CON7: library part ZX62RD-AB-5P8_3
D1 D2: library part DIODE
D3 D4 D5: library part LED-RED_SMD_1
F1 F2: library part FUSE
J4: "Header, 20-Pin"
J5: library part HEADER1X6
L1 L2 L7: library part LQH32C_0
Q2 Q3 Q8: library part L14P2/TO_1
Q7: library part "MOSFET P"
R1 R2 R4 R5 R6 R7 R8 R9 R10 R11 R22 R49 R50 R51 R52 R86 R89 R105 R106 R165 R173 R174: library part R1005_0_Dup1
R3 R15 R16 R17 R18 R19 R20 R21 R24 R27 R28 R29 R32 R43 R46 R119 R120 R128 R129 R131 R133 R135: library part R1005_0
R12 R13 R14: library part Res
R23: library part R
R25 R26 R30 R31 R33 R36 R39 R40 R41 R42 R44 R45 R47: library part RESISTOR_0
R34 R35 R37 R38: library part R_Dup2
R48: library part R0603_0
SW1: library part SW-4
SW2: library part SW-3_1
U1: library part TVP5151
U2 U17: library part TXS0102DCU_1
U3: library part REG1117-3.3, "800mA and 1A Low Dropout Positive Regulator 2.85V, 3.3V, 5V, and Adjustable"
U4: library part MAX3232EEAE
U5: "Current Sensor"
U8: library part DM9621NP_1
U12: library part U-SN75LVDS83BDGG_3
U22: library part RT8065_3
Y1: library part Y_24.576MHZ-5032
Y2: library part XM/SM

## Free pads (board coordinates)
  round 39.37 smd: ""(21192.85,24315.57) ""(24407.85,22285.57)

## Via types
v1: diameter 22, hole 12, TOP to BOTTOM, tented both sides, 194 vias
v2: diameter 22, hole 12, TOP to BOTTOM, 92 vias
v3: diameter 28, hole 16, TOP to BOTTOM, 37 vias
v4: diameter 24, hole 12, TOP to BOTTOM, 17 vias
v5: diameter 50, hole 30, TOP to BOTTOM, tented both sides, 4 vias
v6: diameter 30, hole 20, TOP to BOTTOM, tented both sides, 3 vias
v7: diameter 40, hole 24, TOP to BOTTOM, 1 vias

## Nets (pads, with @x,y where several pads share a name; then routed paths per layer and width w, separated by ;. In a path a pad name is that pad's centre, name@x,y a point inside that pad or via, vN(x,y) a via of type N, cw(c..) or ccw(c..) an arc to the next point about the centre after c; other vN are vias at no path point)
5V_IN: F1.1 J2.1 J2.2 J2.3 J2.4 | length 2877
  TOP w50: F1.1@20956.26,24765 20880,24688.74 20880,22260 20912.62,22227.38 J2.4@20970.63,22227.38 J2.3@21049.37,22227.38 J2.1@21049.37,22148.64 J2.2@20970.63,22148.64
12V: C49.2 C50.2 J3.7 J3.8 J3.9 J3.10 J5.5 J5.6 | length 2393.3
  TOP w50: C49.2@24214.37,25246.67 C50.2@24214.37,25314.84 24214.37,25394.37 24237.1,25417.1 J5.6@24303.82,25417.1 ; 24303.82,25393.82 J5.6@24303.82,25417.1 ; v5(24395,25380) 24357.9,25417.1 J5.6@24303.82,25417.1
  BOTTOM w40: v5@24395,25378.11 24446.89,25378.11 24515,25310 24515,23810 24462.23,23757.23 J3.8@24404.37,23757.23 J3.7@24325.63,23757.23 J3.9@24325.63,23678.49 J3.10@24404.37,23678.49
6260_GPIO1: CON10.69
6260_GPIO2: CON11.5
ACOKB_CHARGER: CON10.65 R173.1 R174.2 | length 474.2
  TOP w6: R174.2@21293.29,23654.14 21349,23598.43 21349,23536 21371.05,23513.95 CON10.65@21609.9,23513.95
  TOP w10: R174.2@21293.29,23654.14 R173.1@21293.29,23717.07
AGND: C4.1 C5.1 R12.1 R16.1 U1.19 | length 1012.1
  TOP w10: R12.1@22944.57,21775 23019.37,21700.2 C5.1@23019.37,21637.5 23019.63,21637.24 U1.19@23137.83,21637.24 ; v1(23015,21410) 23035,21390 23035,21210 23050,21195 23192.1,21195 R16.1@23231.67,21234.57
  BOTTOM w10: v1@23015,21407.5 v1(23015,21705)
AP_SLEEP: CON12.67 R4.2 SW2.3 | length 5161.8
  TOP w6: R4.2@20919.43,25322.85 20923.43,25322.85 v2(20928.43,25317.85) R4.2@20929,25317.85 R4.2@20947.93,25317.85 ; v1(21635,24545) 21660,24545 21831,24374 21861,24374 v1(21880,24355) ; v2(22212.85,23740.57) 22212.85,23757.85 22278.92,23823.92 22411.08,23823.92 ; CON12.67@22411.08,24019.86 22411.08,23823.92 ; v1(24285,24105) 24285,24103.13 24131.87,23950 23330,23950 23130.49,23750.49 22484.51,23750.49 22411.08,23823.92
  BOTTOM w6: v2@20923.28,25319 v2@20929.58,25319 ; v2(20928.43,25317.85) v2@20929.58,25319 ; v1(21635,24545) 21612.85,24567.15 21612.85,25286.15 21580,25319 v2@20929.58,25319 ; v1(21880,24355) 21887.85,24347.15 21887.85,24065.57 v2(22212.85,23740.57) ; v1(24285,24105) 24285,24115 SW2.3@24355,24185
AP_WAKEUP_MD: CON12.68
AV1_IN: C17.1 J1.4 J3.35 J3.36 L1.1 R13.1 R14.2 | length 1859.2
  TOP w15: R13.1@24175.43,21447.6 24177.4,21445.63 C17.1@24245,21445.63 24248.94,21449.57 R14.2@24315,21449.57 ; L1.1@24279.8,21305 24279.8,21414.37 R14.2@24315,21449.57 ; J1.4@24445,21486.89 24407.68,21449.57 R14.2@24315,21449.57
  BOTTOM w15: J3.36@24404.37,22654.87 J3.35@24325.63,22654.87 24299.87,22654.87 24289.51,22644.51 24289.51,21520.49 24323.11,21486.89 J1.4@24445,21486.89
AV2_IN: C20.1 J1.2 J3.39 J3.40 L2.1 R19.2 R32.1 | length 1429.3
  TOP w20: R19.2@24175.43,21657.4 24177.4,21659.37 C20.1@24245,21659.37 ; L2.1@24279.8,21800 24279.8,21694.17 C20.1@24245,21659.37 ; J1.2@24445,21644.37 24434.37,21655 24315.43,21655 R32.1@24315,21655.43 24248.94,21655.43 C20.1@24245,21659.37
  BOTTOM w20: J3.39@24325.63,22481.97 24325.63,21709.37 24390.63,21644.37 J1.2@24445,21644.37 ; J3.39@24325.63,22497.39 J3.40@24404.37,22497.39
BGF_INT: CON13.24
BK_LED: CON12.52
BT_RST: CON10.34
BUF_GPC1_1: U9.11
BUF_GPS_RST: U9.3
BUF_GPS_RXD: R21.1 U9.12 | length 4575.5
  TOP w8: v1@22070,24945 22420,24945 22492.69,25017.69 U9.12@22492.69,25105.28
  TOP w10: v1(22220,23640) 22220,23629.8 22211,23620.8 22211,22872.06 22107,22768.06 22107,22198 22241,22064 22726,22064 22785,22005 R21.1@22785,21945.43
  BOTTOM w10: v1(22070,24950) 22070,25005 22054,25021 22006,25021 21950,24965 21950,24964.8 21922.5,24937.3 21922.5,24472.5 21844.77,24394.77 21844.77,24015.23 v1(22220,23640)
BUF_GPS_TXD: R20.1 U9.16 | length 4449.8
  TOP w8: v1(22030,25000) 22045,24985 22347.93,24985 22413.95,25051.02 U9.16@22413.95,25105.28 ; v1(22255,23645) 22225,23615 22225,22866.26 22121,22762.26 22121,22204 22247,22078 22787,22078 22850,22015 R20.1@22850,21945.43
  BOTTOM w8: v1(22030,25000) 22005,25000 21936.5,24931.5 21936.5,24466.7 21858.77,24388.97 21858.77,24041.23 v1(22255,23645)
BUF_I2C_SCL6: U9.9
BUF_I2C_SDA6: U9.17
BUF_PWRDN_VCM: R40.2 U9.6 | length 3934.6
  TOP w6: R40.2@21840.53,22031 22035,22225.47 22035,22715 v1(22025,22725) ; v1(22050,24900) 22059,24909 22489,24909 22610.8,25030.8 U9.6@22610.8,25105.28 ; v2(22145,22910) 22175,22940 22175,23767.72 v2(22237.85,23830.57)
  BOTTOM w6: v1(22025,22725) 22025,22745 22145,22865 v2(22145,22910) ; v1(22050,24900) 21990,24900 21970.5,24880.5 21970.5,24452.62 21953,24435.12 21953,24249.87 21941,24237.87 21941,24127.42 v2(22237.85,23830.57)
BUF_TP_IOCTL: R26.2 U9.2 | length 155.1
  TOP w10: R26.2@22664.57,25250 22689.54,25225.02 U9.2@22689.54,25105.28
BUF_XPWMTOUT1: C150.1 U9.5 | length 217.2
  TOP w10: U9.5@22630.5,25105.28 22630.5,25279.87 C150.1@22660.63,25310
BUF_XURXD1: U9.20
BUF_XURXD2/UART_AUDIO_RXD: U4.12 U9.13 | length 4581
  TOP w6: v1(22025,24970) 22415,24970 22473.01,25028.01 U9.13@22473.01,25105.28 ; v2(22257.85,23755.57) 22257.85,23737.85 22186,23666 22186,22881 22083,22778 22083,22188.06 22231.06,22040 22675,22040 22705.96,22009.04 U4.12@22705.96,21730.67
  BOTTOM w6: v1(22025,24970) 21995,24970 21948.5,24923.5 21948.5,24461.73 21919,24432.23 21919,24094.42 v2(22257.85,23755.57)
BUF_XUTXD2/UART_AUDIO_TXD: U4.11 U9.8 | length 4691.6
  TOP w6: v1(22025,24920) 22440.21,24920 22571.43,25051.22 U9.8@22571.43,25105.28 ; v2(22282.85,23775.57) 22282.85,23737.85 22197.85,23652.85 22197.85,22877.3 22094,22773.44 22094,22192.62 22235.62,22051 22699,22051 22755.96,21994.04 U4.11@22755.96,21730.67
  BOTTOM w6: v1(22025,24920) 21980,24920 21959.5,24899.5 21959.5,24457.17 21942,24439.67 21942,24254.43 21930,24242.43 21930,24108.42 22249.42,23789.01 22269.42,23789.01 v2(22282.85,23775.57)
CAM2M_PWDN: CON11.46 U1.28 | length 3474.6
  TOP w6: U1.28@23299.25,21412.83 23299.25,21445.75 23294.64,21450.36 23123.99,21450.36 23117.63,21444 22929.38,21444 22899,21474.38 22899,21820.62 23177.38,22099 23854.14,22099 23962.89,22207.75 23962.89,23197.89 23985,23220 v1(23985,23225) ; CON11.46@23625.65,23218.69 23660.97,23218.69 v2(23687.85,23245.57)
  BOTTOM w6: v2(23687.85,23245.57) 23746.28,23304 23893.57,23304 23972.57,23225 v1(23985,23225)
CAM2M_RST: CON11.44 U1.8 | length 2679.1
  TOP w6: CON11.44@23625.65,23238.36 23652.36,23238.36 23672.85,23258.86 v2(23672.85,23275.57)
  TOP w10: U1.8@23492.17,21700.24 23515,21723.07 23515,21910 23545,21940 23920,21940 24125,22145 24125,22985 24200,23060 v1(24200,23205)
  BOTTOM w6: v2(23672.85,23275.57) 23712.28,23315 23898.13,23315 23969.13,23244 24016,23244 24055,23205 v1(24200,23205)
CAM5M_PWDN: CON11.48
CAM5M_RST: CON11.41
CAM_D0: CON11.30 U1.18 | length 3105.1
  TOP w6: U1.18@23137.83,21668.74 23101.26,21668.74 23090,21680 23090,21980.5 23186.5,22077 23863.25,22077 23984.89,22198.64 23984.89,23084.89 24025,23125 v1(24025,23135) ; v2(23522.85,23376.82) 23541.85,23376.82 23542.51,23376.17 CON11.30@23625.65,23376.17
  BOTTOM w6: v2(23522.85,23376.82) 23522.85,23306.57 23638.85,23190.57 23732.85,23190.57 23812.85,23270.57 23867.82,23270.57 23979.39,23159 24002.87,23159 24025,23136.87 v1(24025,23135)
CAM_D1: CON11.29 U1.17 | length 2851.3
  TOP w6: U1.17@23137.83,21700.24 23101,21737.07 23101,21975.95 23191.05,22066 23867.81,22066 23995.89,22194.08 23995.89,23065.89 24044,23114 24044,23251 24030,23265 v1(24010,23265) ; CON11.29@23743.76,23376.17 v1(24048.83,23376.17) v1@24050,23375
  BOTTOM w6: v1(24010,23265) 24000,23275 24000,23355 24021.17,23376.17 v1(24048.83,23376.17)
CAM_D2: CON11.32 U1.16 | length 2979.3
  TOP w6: v2(23497.85,23330.57) 23523.76,23356.47 CON11.32@23625.65,23356.47
  TOP w8: U1.16@23204.76,21767.17 23204.76,21785.24 23180,21810 23160,21810 23115,21855 23115,21968.54 23200.46,22054 23872.78,22054 24007.89,22189.11 24007.89,23047.89 v1(24030,23070)
  BOTTOM w6: v2(23497.85,23330.57) 23497.85,23270.57 23607.85,23160.57 23757.85,23160.57 23807.28,23210 23880,23210 24020,23070 v1(24030,23070)
CAM_D3: CON11.31 U1.15 | length 2794.1
  TOP w8: U1.15@23236.26,21767.17 23236.26,21808.74 23220,21825 23170,21825 23130,21865 23130,21965.15 23205.85,22041 23878.16,22041 24020.89,22183.73 24020.89,23025.89 24060,23065 24060,23223.38 24085,23248.38 v1(24085,23310) ; CON11.31@23743.76,23356.47 23744.07,23356.17 24079.69,23356.17 v1@24080,23356.47
  BOTTOM w8: v1(24080,23360) 24085,23355 v1(24085,23310)
CAM_D4: CON11.34 U1.14 | length 3016.6
  TOP w6: v2(23547.85,23335.57) 23555.16,23342.88 23587.83,23342.88 23593.9,23336.8 CON11.34@23625.65,23336.8
  TOP w8: U1.14@23267.76,21767.17 23267.76,21827.24 23255,21840 23175.23,21840 23146,21869.23 23146,21962.77 23211.23,22028 23883.55,22028 24033.89,22178.34 24033.89,23018.34 24085,23069.45 24085,23100
  BOTTOM w6: v2(23547.85,23335.57) 23547.85,23316.57 23658.85,23205.57 23722.85,23205.57 23799.28,23282 23884.46,23282 23981.46,23185 24040,23185 24080,23145 v1(24080,23110)
CAM_D5: CON11.33 U1.13 | length 2835.9
  TOP w6: CON11.33@23743.76,23336.8 24098.2,23336.8 24105,23330
  TOP w8: U1.13@23299.25,21767.17 23299.25,21845.75 23292,21853 23180.62,21853 23159,21874.62 23159,21957.38 23216.62,22015 23888.93,22015 24046.89,22172.96 24046.89,23012.96 24105,23071.07 24105,23330
CAM_D6: CON11.36 U1.12 | length 3023.6
  TOP w6: v2(23572.85,23320.57) 23576.32,23317.1 CON11.36@23625.65,23317.1
  TOP w8: U1.12@23330.75,21767.17 23330.75,21844.25 23309,21866 23186,21866 23175,21877 23175,21955 23222,22002 23894.32,22002 24059.89,22167.57 24059.89,23007.57 24125,23072.68 v1(24125,23115)
  BOTTOM w6: v2(23572.85,23320.57) 23672.85,23220.57 23712.85,23220.57 23785.28,23293 23889.02,23293 23976.62,23205.39 24035.16,23205.39 24125,23115.56 v1(24125,23115)
CAM_D7: CON11.35 R24.1 R43.1 U1.11 | length 2575.2
  TOP w6: CON11.35@23743.76,23317.1 24017.9,23317.1 v1(24025,23310)
  TOP w8: R43.1@23300.43,21895 R24.1@23364.57,21895 23364.57,21959.57 23394,21989 23899.7,21989 24072.89,22162.19 24072.89,23002.19 24145,23074.3 24145,23210 v1(24125,23230) ; U1.11@23362.24,21767.17 R24.1@23362.24,21877.68
  BOTTOM w8: v1(24025,23310) 24030,23305 24030,23270 24045,23255 24100,23255 v1(24125,23230)
CAM_HREF: CON11.27 R17.2 R18.2 | length 3678.8
  TOP w6: CON11.27@23743.76,23395.84 24079.16,23395.84 v1(24080,23395)
  TOP w10: R17.2@23163.33,21234.57 R18.2@23095,21234.57 23070,21234.57 23055,21249.57 23055,21400 23024,21431 22924,21431 22886,21469 22886,21826 23172,22112 23848.76,22112 23949.89,22213.14 23949.89,23234.89 23975,23260 v1(23975,23265)
  BOTTOM w10: v1(23975,23265) 23975,23260 23970,23265 23970,23370 23997.17,23397.17 v1@24077.83,23397.17
CAM_MCLK: CON11.28
CAM_PCLK: CON11.39 U1.9 | length 2453.9
  TOP w6: CON11.39@23743.76,23277.73 23898.73,23277.73 23905,23284 24056,23284 v1(24065,23275)
  TOP w10: U1.9@23425.24,21767.17 23425.24,21810.24 23472.5,21857.5 23472.5,21947.5 23500,21975 23905.5,21975 24086.89,22156.39 24086.89,22996.39 24159,23068.5 24159,23246 v1(24145,23260)
  BOTTOM w6: v1(24065,23275) 24130,23275 v1(24145,23260)
CAM_VSYNC: CON11.42 U1.24 | length 3355.9
  TOP w6: U1.24@23137.83,21479.76 23113.07,21455 22933.94,21455 22910,21478.94 22910,21816.06 23181.94,22088 23858.7,22088 23973.89,22203.2 23973.89,23113.89 v1(23990,23130) ; v2(23557.85,23240.57) 23575.34,23258.06 CON11.42@23625.65,23258.06
  BOTTOM w6: v2(23557.85,23240.57) 23622.85,23175.57 23747.85,23175.57 23820.35,23248.07 23871.32,23248.07 23989.39,23130 v1(23990,23130)
CHG_COK: CON10.66
CHG_DOK: CON10.67 R165.1 | length 530
  TOP w6: R165.1@21293.29,23780 21320,23780 21360,23740 21360,23550 21376.36,23533.64 CON10.67@21609.9,23533.64
CHG_EN: CON11.52 R7.2 | length 4690.1
  TOP w6: v2(23407.85,23095.57) 23425.85,23113.57 23515.85,23113.57 23561.9,23159.62 CON11.52@23625.65,23159.62
  TOP w10: R7.2@21345,25479.57 21315,25509.57 21315,25580 21330,25595 v1(21475,25595)
  BOTTOM w6: v1(21475,25595) 21480,25600 21790,25600 22135,25255 23265,25255 23293.13,25226.87 23293.13,24990 23389.13,24894 23402.87,24894 23414,24882.87 23414,23101.72 v2(23407.85,23095.57)
CHG_FLT: CON10.68
CHG_UOK: CON10.71
CLK_SEL: R86.2 R89.1 U12.17 | length 271.4
  TOP w6: v1(23205,24730) 23212.07,24737.07 U12.17@23212.07,24805.4 ; R86.2@23224.57,24545 v1(23224.57,24602.85)
  BOTTOM w6: v1(23205,24730) 23205,24706.87 23219,24692.87 23219,24608.42 v1(23224.57,24602.85)
COMPASS_RDY: CON10.57
DC33_EN: CON10.70
DC33V: C11.1 C12.1 C25.1 C30.1 C31.1 C32.1 C33.1 C34.1 C59.1 C60.1 CON13.1 CON13.2 D1.1 J2.11 J2.12 R30.2 R36.1 R39.1 R41.1 U2.7 U4.16 U8.24 U8.37 U8.42 U8.45 U9.7 U9.18 U12.9 U12.34 U12.44 | length 13016.2
  TOP w10: C32.1@21709.69,21824.69 21740,21794.37 21740,21762.24 21821.83,21680.41 U8.42@21876.12,21680.41 ; C31.1@21715,21621.36 U8.45@21876.12,21621.36 ; C33.1@21722.68,22031 21748.85,22031 ; R30.2@21779.64,22031 21748.85,22031 ; U8.37@21876.12,21778.84 21821.16,21778.84 21805,21795 21805,21850 21748.85,21906.15 21748.85,22031 ; 22475,21650 22475,21375 22539.37,21310.63 C12.1@22550,21310.63 ; U4.16@22505.96,21730.67 22505.96,21861.59 C11.1@22515,21870.63 ; v3(22585,25222.64) 22591.13,25216.52 U9.7@22591.13,25105.28 ; v1(23015,24725) 23054.59,24764.59 U12.9@23054.59,24805.4 ; CON13.1@23060.69,22397.81 CON13.2@23060.69,22515.93 ; v1(23125,25210) 23119,25204 23119,25161.3 23133.33,25146.98 U12.44@23133.33,25110.52 23133.33,25056.67 23160,25030 ; v1(23160,24910) 23160,25030 ; U12.34@23330.18,25110.52 23330.18,25007.64 ; 23457.22,25007.64 23330.18,25007.64 ; v1(23590,24435) 23600,24445 23750,24445 23855.16,24550.16 23855.16,24584.84 U2.7@23890.04,24584.84 23950.11,24584.84 23959.95,24575 24010.63,24575 C25.1@24050,24614.37 ; 23160,25030 23182.36,25007.64 23330.18,25007.64
  TOP w12: U8.24@22159.59,21778.84 22272.59,21778.84 C34.1@22312.74,21738.69 ; v3(22372.85,25222.64) 22374.58,25220.91 U9.18@22374.58,25105.28 ; CON13.2@23060.69,22515.93 v3(23120.21,22515.93)
  TOP w15: R36.1@22145,22030.43 22204.57,22030.43 22312.74,21922.26 v1(22312.74,21835) 22312.74,21738.69 C34.1@22312.74,21720.57 ; C34.1@22328.29,21720.57 R39.1@22403.29,21645.57 ; R41.1@22405.43,21575 22405.43,21643.42 R39.1@22403.29,21645.57 ; U4.16@22505.96,21730.67 22505.96,21680.96 22475,21650 22470.57,21645.57 R39.1@22403.29,21645.57
  TOP w20: J2.12@20970.63,22542.34 J2.11@21049.37,22542.34 21197.66,22542.34 21250,22490 v1(21250,22430) ; C31.1@21714.37,21610 v1(21715,21610) ; v1(22005,25290) D1.1@22005,25394.51 ; v1(23305,22460) 23305,22942.72 v3(23452.85,23090.57) ; C60.1@23497.85,25048.27 23457.22,25007.64 23455,25005.42 23455,24905 C59.1@23503.46,24856.54
  TOP w30: 23099.85,22343.57 23120,22323.42 v1(23120,22240)
  BOTTOM w10: v1(23015,24725) 23160,24870 v1(23160,24910)
  BOTTOM w12: v1(22005,25290) 22080,25290 22147.36,25222.64 v3(22372.85,25222.64) v3(22585,25222.64) 22762.36,25222.64 ; v1(22795,25139.02) 22795,25190 22762.36,25222.64 ; v1(23125,25210) 23112.36,25222.64 22762.36,25222.64
  BOTTOM w20: 21250,22442 v1(21250,22430) 21250,21960 21415,21795 21670,21795 21700,21825 v1(21710,21825) ; v1(21715,21610) 21770,21555 22140,21555 22190,21605 22190,21690 22312.74,21812.74 v1(22312.74,21835) 22345.24,21802.5 23005.07,21802.5 23120,21917.43 v1(23120,22240) ; v1(21720,22035) 21710,22025 v1(21710,21825) ; v1@22316.37,21838.63 22280,21875 22126.96,21875 22076.96,21825 v1(21710,21825) ; v3(23120.21,22515.93) 23175.57,22460.57 v1@23305,22460.57 ; v3(23452.85,23090.57) 23452.85,23630.57 23607.85,23785.57 23607.85,24417.15 v1(23590,24435) 23510.91,24514.09 23510.91,24869.09 v1(23505,24875)
EECK: U8.21
EECS: U8.22
EEDIO: U8.20
GM_INT1: CON10.51